# Altium PCB WireLessPhone.PcbDoc
Units mm, origin at the board's own origin, x right, y up, seen from the top; angles counter-clockwise.
Board outline 70 x 40 mm, 2 copper layers (Top Signal Layer, Bottom Signal Layer), stack 1.571 mm thick; 92 components, 56 nets, 347 pads, 0 vias.
Unrouted connection lines stored in the file: 216.
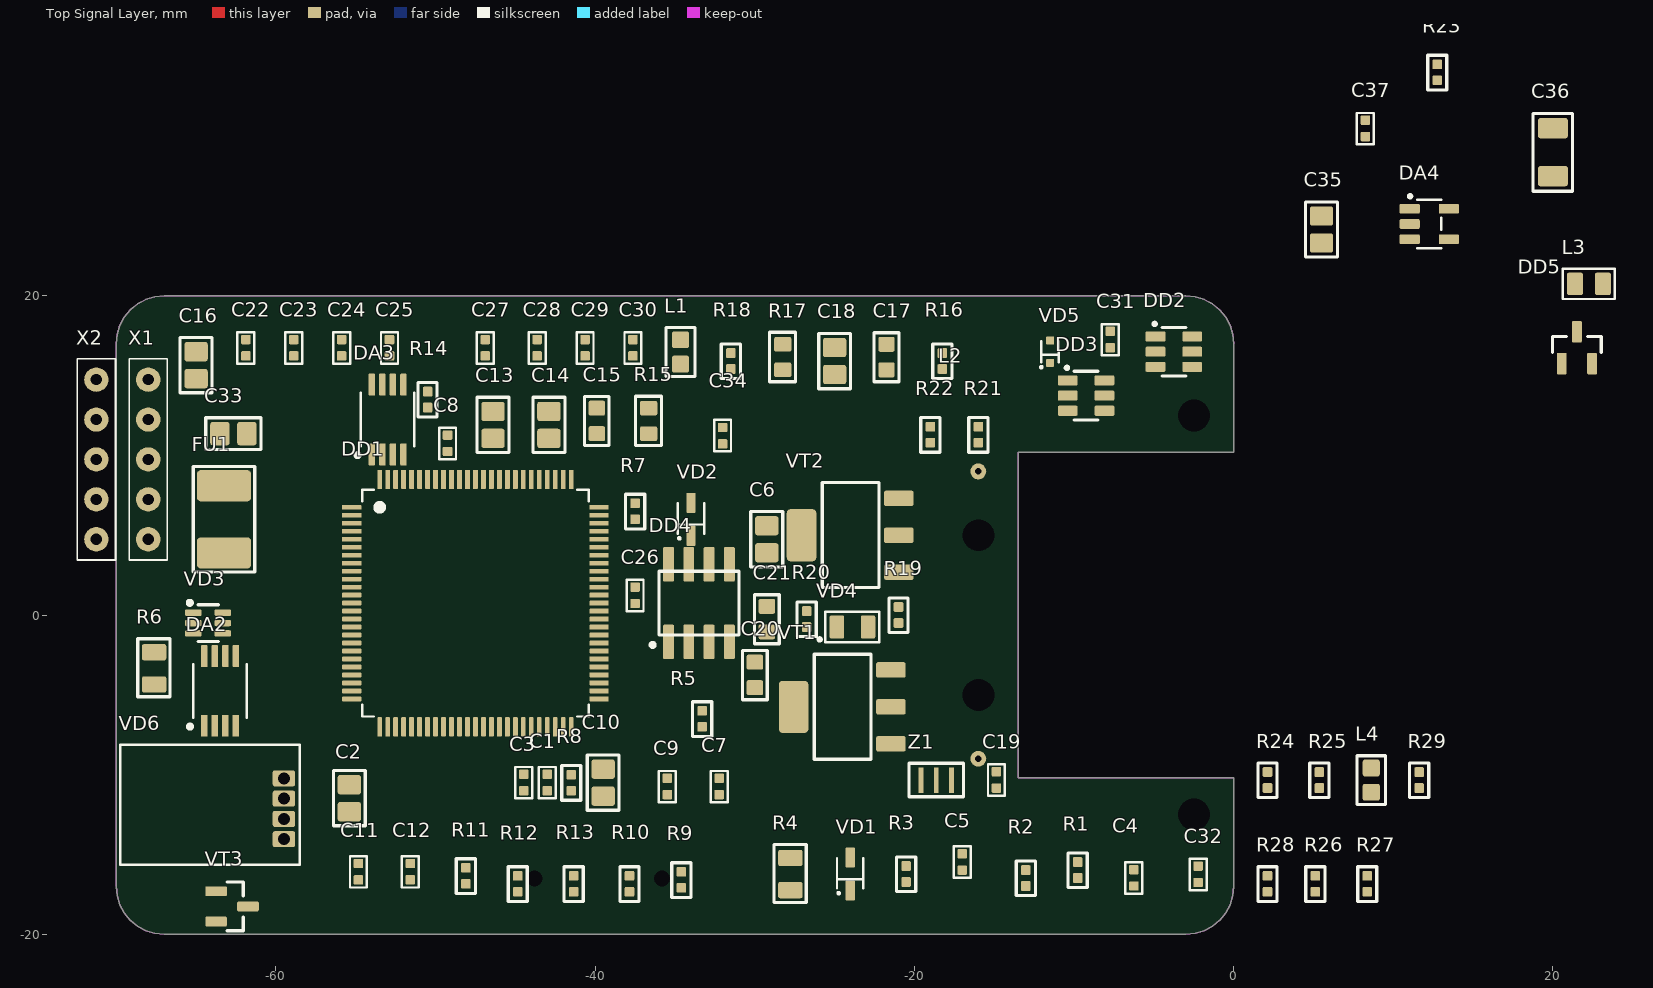
[diagram p0: Top Signal Layer view]
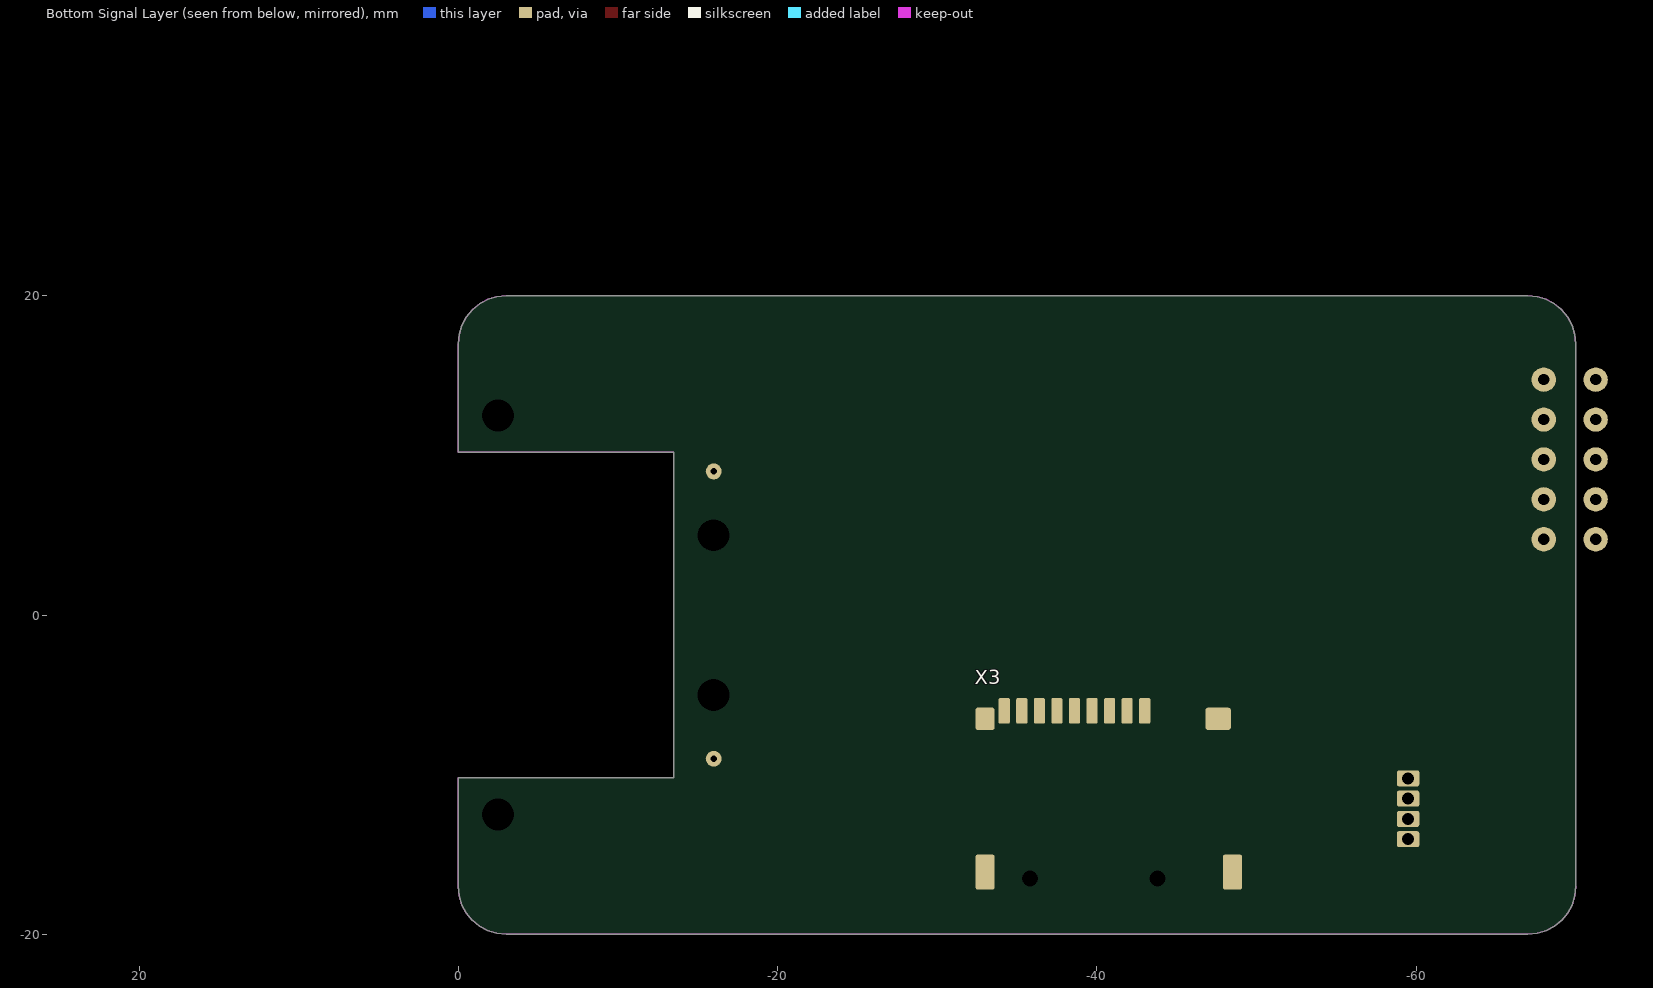
[diagram p1: Bottom Signal Layer view, seen from below]

## Layer stack, top to bottom
Top Solder: solder mask 0.0102, Solder Resist, Dk 3.5
Top Signal Layer: signal copper 0.0356
Dielectric 1: core 1.5, FR-4, Dk 4.2
Bottom Signal Layer: signal copper 0.0356
Bottom Solder: solder mask 0.0102, Solder Resist, Dk 3.5

## Board outline
0,-10.2 -13.5,-10.2 -13.5,10.2 0,10.2 0,17 -0.058,17.585 -0.228,18.148 -0.506,18.667 -0.879,19.121 -1.333,19.494 -1.852,19.772 -2.415,19.942 -3,20 -67,20 -67.585,19.942 -68.148,19.772 -68.667,19.494 -69.121,19.121 -69.494,18.667 -69.772,18.148 -69.942,17.585 -70,17 -70,-17 -69.942,-17.585 -69.772,-18.148 -69.494,-18.667 -69.121,-19.121 -68.667,-19.494 -68.148,-19.772 -67.585,-19.942 -67,-20 -3,-20 -2.415,-19.942 -1.852,-19.772 -1.333,-19.494 -0.879,-19.121 -0.506,-18.667 -0.228,-18.148 -0.058,-17.585 0,-17

## Design rules (kind name [scope] priority, off if disabled: settings)
Clearance Clearance_tracks_inner [OnLayer('Power Layer') OR OnLayer('Ground Layer')] p1: gap=0.35 ignorepadtopadclearanceinfootprint=FALSE except(0: Arc-Hole Track-Hole SMDPad-Hole THPad-Hole Via-Hole Fill-Hole Poly-Hole Region-Hole Text-Hole) // Зазоры между проводниками на внутренних слоях
Clearance Clearance_VccGnd [InNet('3,3ВD') vs InNet('DGND')] p2: gap=0.2 ignorepadtopadclearanceinfootprint=FALSE except(0: Arc-Hole Track-Hole SMDPad-Hole THPad-Hole Via-Hole Fill-Hole Poly-Hole Region-Hole Text-Hole; 0.4: THPad-Poly)
Clearance Clearance_VccGnd_1 [InNet('NetVD9_1') vs InNet('DGND')] p3: gap=0.2 ignorepadtopadclearanceinfootprint=FALSE except(0: Arc-Hole Track-Hole SMDPad-Hole THPad-Hole Via-Hole Fill-Hole Poly-Hole Region-Hole Text-Hole; 0.4: THPad-Poly)
Clearance Clearance_VccGnd_2 [InNet('NetVD2_2') vs InNet('DGND')] p4: gap=0.2 ignorepadtopadclearanceinfootprint=FALSE except(0: Arc-Hole Track-Hole SMDPad-Hole THPad-Hole Via-Hole Fill-Hole Poly-Hole Region-Hole Text-Hole; 0.4: THPad-Poly)
Clearance Clearance_VccGnd_5 [InNet('NetVD8_1') vs InNet('DGND')] p5: gap=0.2 ignorepadtopadclearanceinfootprint=FALSE except(0: Arc-Hole Track-Hole SMDPad-Hole THPad-Hole Via-Hole Fill-Hole Poly-Hole Region-Hole Text-Hole; 0.4: THPad-Poly)
Clearance Clearance_VccGnd_3 [InNet('NetVD10_1') vs InNet('DGND')] p6: gap=0.2 ignorepadtopadclearanceinfootprint=FALSE except(0: Arc-Hole Track-Hole SMDPad-Hole THPad-Hole Via-Hole Fill-Hole Poly-Hole Region-Hole Text-Hole; 0.4: THPad-Poly)
Clearance Clearance_VccGnd_4 [InNet('NetVD11_1') vs InNet('DGND')] p7: gap=0.2 ignorepadtopadclearanceinfootprint=FALSE except(0: Arc-Hole Track-Hole SMDPad-Hole THPad-Hole Via-Hole Fill-Hole Poly-Hole Region-Hole Text-Hole; 0.4: THPad-Poly)
Clearance Clearance_VccANGnd [InNet('3,3ВA') vs InNet('AGND')] p8: gap=0.2 ignorepadtopadclearanceinfootprint=FALSE except(0: Arc-Hole Track-Hole SMDPad-Hole THPad-Hole Via-Hole Fill-Hole Poly-Hole Region-Hole Text-Hole; 0.4: THPad-Poly)
Clearance [All] p9: gap=0.2 ignorepadtopadclearanceinfootprint=FALSE except(0: Arc-Hole Track-Hole SMDPad-Hole THPad-Hole Via-Hole Fill-Hole Poly-Hole Region-Hole Text-Hole)
ComponentClearance [All] p1: gap=0.001 collisioncheckmode=3 verticalgap=0 showdistances=FALSE
Height [All] p1: minheight=0 maxheight=100 prefheight=12.7
HoleSize [All] p1: absolutevalues=TRUE maxlimit=10 minlimit=0.3 maxpercent=80.000 minpercent=20.000
MinimumSolderMaskSliver [All] p1: minsoldermaskwidth=0.1
PolygonConnect PolygonConnect_MOTOR1 [InNet('NetA1_16')] p1: connectstyle=Direct reliefconductorwidth=0.254 reliefentries=4 polygonreliefangle="90 Angle" airgapwidth=0.254
PolygonConnect PolygonConnect_MOTOR2 [InNet('NetA1_17')] p2: connectstyle=Direct reliefconductorwidth=0.254 reliefentries=4 polygonreliefangle="90 Angle" airgapwidth=0.254
PolygonConnect PolygonConnect_MOTOR3 [InNet('NetA1_5')] p3: connectstyle=Direct reliefconductorwidth=0.254 reliefentries=4 polygonreliefangle="90 Angle" airgapwidth=0.254
PolygonConnect PolygonConnect_MOTOR4 [InNet('NetA1_4')] p4: connectstyle=Direct reliefconductorwidth=0.254 reliefentries=4 polygonreliefangle="90 Angle" airgapwidth=0.254
PolygonConnect PolygonConnect_SHUNT+ [InNet('8,4В')] p5: connectstyle=Direct reliefconductorwidth=0.254 reliefentries=4 polygonreliefangle="90 Angle" airgapwidth=0.254
PolygonConnect PolygonConnect_SHUNT- [InNet('NetC1_1')] p6: connectstyle=Direct reliefconductorwidth=0.254 reliefentries=4 polygonreliefangle="90 Angle" airgapwidth=0.254
PolygonConnect PolygonConnect_FUSE [InNet('NetFU1_1')] p7: connectstyle=Direct reliefconductorwidth=0.254 reliefentries=4 polygonreliefangle="90 Angle" airgapwidth=0.254
PolygonConnect PolygonConnect_SERVO [InNet('NetX3_1')] p8: connectstyle=Direct reliefconductorwidth=0.254 reliefentries=4 polygonreliefangle="90 Angle" airgapwidth=0.254
PolygonConnect PolygonConnect_Via [IsVia] p9: connectstyle=Direct reliefconductorwidth=0.254 reliefentries=4 polygonreliefangle="90 Angle" airgapwidth=0.2
PolygonConnect [All] p10: connectstyle=Relief reliefconductorwidth=0.6 reliefentries=4 polygonreliefangle="90 Angle" airgapwidth=0.2
RoutingVias [All] p1: holewidth=0.711 width=1.27 viastyle="Through Hole" minholewidth=0.711 minwidth=1.27 maxholewidth=0.711 maxwidth=1.27
ShortCircuit ShortCircuit_ANALOG [InNet('3,3В') vs InNet('3,3ВA')] p1: allowed=TRUE
ShortCircuit [All] p2: allowed=FALSE
SilkToSilkClearance [All] p1: silktosilkclearance=0
SilkToSolderMaskClearance [IsPad] p1: minsilkscreentomaskgap=0 clearancetoexposedcopper=TRUE
SolderMaskExpansion [All] p1: expansion=0.05
Width [All] p1: maxlimit=4 minlimit=0.2 preferedwidth=0.2
Width 3,3В [InNet('3,3В')] p2: maxlimit=2 minlimit=0.2 preferedwidth=1
Width 24В [InNet('24В')] p3: maxlimit=4 minlimit=0.2 preferedwidth=4
Width 5В [InNet('5В')] p4: maxlimit=3 minlimit=0.2 preferedwidth=3
23 further rules are at their usual default settings.

## Classes and differential pairs
component class WireLessPhone_PhotoHall: C29 C30 C33 C37 DD5 L4 R13 R19 R21 R22 R23 R24 R25 R29 VD6 X3
component class WireLessPhone_Microcontroller: C5 C7 C8 C12 C19 C20 C21 C22 C23 C24 C25 C26 C27 C28 C30 C31 C32 C34 DD1 DD2 DD3 DD4 L1 R12 R20 R26 R27 R28 VD4 VD5 X2 Z1
component class WireLessPhone_Power: C13 C14 C15 C16 C17 C18 C35 C36 DA3 DA4 FU1 L3 R14 R15 R16 R17 R18 VD3 X1
component class WireLessPhone_Amp: C1 C2 C3 C4 C6 C9 C10 C11 DA2 L2 R1 R2 R3 R4 R5 R6 R7 R8 R9 R10 R11 VD1 VD2 VT1 VT2 VT3 VT?

## Components (designator, comment, footprint, x,y, rotation, side; value= is the part's Value field where it differs from the comment)
C1 "Capacitor" C0402 -43.02,-11 r90 top value=10
C2 "Capacitor" C0805 -55.4,-11.472 r90 top value=10мк
C3 "Capacitor" C0402 -44.5,-11 r90 top value=?
C4 "Capacitor" C0402 -6.274,-16.972 r90 top value=0,1мк
C5 "Capacitor" C0402 -17.024,-15.972 r90 top value=0,1мк
C6 "Capacitor" C0805 -29.25,4.75 r90 top value=10мк
C7 "Capacitor" C0402 -32.25,-11.246 r90 top value=0,1мк
C8 "Capacitor" C0402 -49.27,10.25 r90 top value=0,1мк
C9 "Capacitor" C0402 -35.5,-11.246 r90 top value=0,1мк
C10 "Capacitor" C0805 -39.5,-10.5 r90 top value=10мк
C11 "Capacitor" C0402 -54.85,-16.586 r90 top value=1мк
C12 "Capacitor" C0402 -51.6,-16.586 r90 top value=0,1мк
C13 "Capacitor" C0805 -46.4,11.914 r90 top value=4,7мк
C14 "Capacitor" C0805 -42.9,11.914 r90 top value=4,7мк
C15 "Capacitor" C0603 -39.9,12.164 r90 top value=0,1мк
C16 "Capacitor" C0805 -65,15.655 r90 top value=10мк
C17 "Capacitor" C0603 -21.75,16.164 r90 top value=0,1мк
C18 "Capacitor" C0805 -25,15.914 r90 top value=10мк
C19 "Capacitor" C0402 -14.883,-10.836 r90 top value=0,1мк
C20 "Capacitor" C0603 -30,-3.75 r90 top value=2,2мк
C21 "Capacitor" C0603 -29.25,-0.25 r90 top value=2,2мк
C22 "Capacitor" C0402 -61.905,16.235 r90 top value=0,1мк
C23 "Capacitor" C0402 -58.905,16.235 r90 top value=0,1мк
C24 "Capacitor" C0402 -55.905,16.235 r90 top value=0,1мк
C25 "Capacitor" C0402 -52.905,16.235 r90 top value=0,1мк
C26 "Capacitor" C0402 -37.52,0.725 r90 top value=0,1мк
C27 "Capacitor" C0402 -46.905,16.235 r90 top value=0,1мк
C28 "Capacitor" C0402 -43.655,16.235 r90 top value=0,1мк
C29 "Capacitor" C0402 -40.655,16.235 r90 top value=0,1мк
C30 "Capacitor" C0402 -37.655,16.235 r90 top value=0,1мк
C31 "Capacitor" C0402 -7.75,16.75 r90 top value=0,1мк
C32 "Capacitor" C0402 -2.25,-16.75 r90 top value=0,1мк
C33 "Capacitor" C0805 -62.664,11.367 r180 top value=4,7мк
C34 "Capacitor" C0402 -32,11.75 r270 top value=0,1мк
C35 "Capacitor" C0805 5.5,24.155 r90 top value=4,7мк
C36 "Capacitor" C1206 19.976,29.028 r90 top value=10мк
C37 "Capacitor" C0402 8.23,29.975 r90 top value=0,1мк
DA2 "MAX4241" 8µMAX -63.5,-4.75 r90 top
DA3 "MAX4241" 8µMAX -53,12.25 r90 top
DA4 "LM3671MF-3.3/NOPB" SOT23-5 12.25,24.5 r0 top
DD1 "STM32F407VGT6" LQFP100 -47.5,0.75 r0 top
DD2 "TPD2S017" SOT23-6 -3.75,16.5 r0 top
DD3 "TPD2S017" SOT23-6 -9.25,13.75 r0 top
DD4 "MCP4921-E/P" SO8 -33.5,0.75 r90 top
DD5 "DRV5032" SOT23-3 21.5,16.75 r90 top
FU1 "Fuse" FUSE812 -63.25,6 r90 top
L1 "Inductor" L0603 -34.655,16.485 r90 top
L2 "InductorSerd" InductorPetlya 0,0 r0 top locked
L3 "Inductor" L0805 22.25,20.75 r0 top value=2,2мкГн
L4 "Inductor" L0603 8.617,-10.336 r90 top
R1 "Resistor_0,062Вт" R0402 -9.774,-15.972 r90 top value=620
R2 "Resistor_0,062Вт" R0402 -13.024,-16.472 r90 top value=4,7к
R3 "Resistor_0,062Вт" R0402 -20.524,-16.222 r90 top value=?
R4 "Resistor_0,125Вт" R0805 -27.774,-16.222 r90 top value=1
R5 "Resistor_0,062Вт" R0402 -33.3,-6.5 r90 top value=?
R6 "Resistor_0,125Вт" R0805 -67.633,-3.336 r90 top value=1
R7 "Resistor_0,062Вт" R0402 -37.5,6.5 r90 top value=3,3к
R8 "Resistor_0,062Вт" R0402 -41.5,-10.5 r90 top value=620
R9 "Resistor_0,062Вт" R0402 -34.6,-16.586 r90 top value=47
R10 "Resistor_0,062Вт" R0402 -37.85,-16.836 r90 top value=?
R11 "Resistor_0,062Вт" R0402 -48.1,-16.336 r90 top value=10к
R12 "Resistor_0,062Вт" R0402 -44.85,-16.836 r90 top value=510
R13 "Resistor_0,062Вт" R0402 -41.35,-16.836 r90 top value=100
R14 "Resistor_0,062Вт" R0402 -50.5,13.5 r90 top value=100к
R15 "Resistor_0,062Вт" R0603 -36.65,12.164 r90 top value=10к
R16 "Resistor_0,062Вт" R0402 -18.25,15.914 r90 top value=22
R17 "Resistor_0,062Вт" R0603 -28.25,16.164 r90 top value=10к
R18 "Resistor_0,062Вт" R0402 -31.5,15.914 r90 top value=22
R19 "Resistor_0,062Вт" R0402 -21,0 r90 top value=10к
R20 "Resistor_0,062Вт" R0402 -26.75,-0.25 r90 top value=10к
R21 "Resistor_0,062Вт" R0402 -16,11.3 r90 top value=10к
R22 "Resistor_0,062Вт" R0402 -19,11.3 r90 top value=10к
R23 "Resistor_0,062Вт" R0402 12.75,34 r90 top value=4,7к
R24 "Resistor_0,062Вт" R0402 2.117,-10.336 r90 top value=10к
R25 "Resistor_0,062Вт" R0402 5.367,-10.336 r90 top value=10к
R26 "Resistor_0,062Вт" R0402 5.117,-16.836 r90 top value=10к
R27 "Resistor_0,062Вт" R0402 8.367,-16.836 r90 top value=10к
R28 "Resistor_0,062Вт" R0402 2.117,-16.836 r90 top value=10к
R29 "Resistor_0,062Вт" R0402 11.617,-10.336 r90 top value=1к
VD1 "Diode" SOD-323 -24.024,-16.222 r90 top
VD2 "Diode" SOD-323 -34,6 r90 top
VD3 "USBUF" SOT323-6L -64.25,-0.5 r0 top
VD4 "LED" L_0805 -23.883,-0.75 r0 top
VD5 "DiodeSchottky" SOD-523 -11.5,16.5 r90 top
VD6 "IR_LED" TVCAST -59.5,-12.135 r90 top
VT1 "BJT NPN" SOT-223 -24.5,-5.75 r90 top
VT2 "BJT PNP" SOT-223 -24,5 r90 top
VT3 "N-MOSFET" SOT23-3 -62.75,-18.25 r0 top
X1 "Header_5_sct" 5HOLE_2.5 -68,4.75 r90 top
X2 "Header_5_sct" 5HOLE_2.5 -71.25,4.75 r90 top
X3 "MICROSD-SDIO" MICROSD -40.75,-16.5 r180 bottom
Z1 "QuartzWithCaps" CSTCE -18.633,-10.336 r0 top

## Footprints (in the part's own frame and the unit in brackets; to place one, negate y for a bottom-side part, rotate by r counter-clockwise, add the part's x,y. Pads: shape width x height; smd on the part's side, far side on the other; paste and mask are expansions set on the pad)
5HOLE_2.5 [mil]
  round 60 hole 27.56: 1(0,0) 2(98.43,0) 3(196.85,0) 4(295.28,0) 5(393.7,0)
  silkscreen extent -51,-47 445,47
8µMAX [mil]
  rrect25% 54x16 smd: 1(-86,39) 2(-86,13) 3(-86,-13) 4(-86,-39) 5(86,-39) 6(86,-13) 7(86,13) 8(86,39)
  silkscreen extent -93,-66 66,79, body extent -99,-58 97,60, height 37
C0402 [mm]
  rrect25% 0.59x0.6 smd: 1(0,-0.02) 2(1.025,-0.02)
  silkscreen extent -0.48,-0.55 1.48,0.51, body extent 0.01,-0.25 1.01,0.25, height 0.48
C0603 [mm]
  rrect25% 0.94x1.03 smd: 1(-0.8,0) 2(0.8,0)
  silkscreen extent -1.55,-0.77 1.53,0.77, body extent -0.8,-0.4 0.8,0.4, height 0.9
C0805 [mm]
  rrect25% 1.21x1.46 smd paste-5: 1(-0.845,0) 2(0.845,0)
  silkscreen extent -1.73,-1 1.73,1, body extent -1,-0.62 1,0.63, height 0.78
C1206 [mm]
  rrect25% 1.28x1.87 smd: 1(-1.528,-0.024) 2(1.472,-0.024)
  silkscreen extent -2.47,-1.25 2.4,1.22, body extent -1.6,-0.85 1.6,0.85, height 1.75
CSTCE [mm]
  rect 0.3x1.6 smd: 1(-0.95,0) 2(0,0) 3(0.95,0)
  silkscreen extent -1.7,-1.05 1.7,1.05, body extent -1.6,-0.65 1.6,0.65, height 1.02
FUSE812 [mm] "Самовосстанавливающийся предохранитель"
  rrect25% 1.95x3.4 smd: 1(-2.1,0) 2(2.1,0)
  silkscreen extent -3.3,-1.92 3.3,1.92, body extent -2.41,-1.61 2.41,1.61, height 1.32
InductorPetlya [mm]
  round 1 hole 0.4 unplated: 1(-16,9) 2(-16,-9)
  round 0 hole 2 unplated: ""(-16,-5) ""(-16,5) ""(-2.5,-12.5) ""(-2.5,12.5)
  body extent -18.5,-15 0,15, height 1.7
L0603 [mm]
  rrect25% 1.05x1.07 smd paste-5: 1(-0.76,0) 2(0.76,0)
  silkscreen extent -1.53,-0.9 1.53,0.9, body extent -0.8,-0.4 0.8,0.4, height 0.8
L0805 [mm]
  rrect25% 1x1.4 smd: 1(-0.875,0) 2(0.875,0)
  silkscreen extent -1.63,-0.95 1.63,0.95, body extent -1,-0.6 1,0.6, height 0.95
L_0805 [mm] "SMD LED LAMP"
  rrect25% 0.91x1.46 smd: 1(-0.975,0) 2(0.975,0)
  silkscreen extent -2.15,-0.95 1.68,0.95, body extent -1.01,-0.62 1.01,0.63, height 1.1
LQFP100 [mm]
  rrect25% 1.2x0.3 smd: 1(-7.75,6) 2(-7.75,5.5) 3(-7.75,5) 4(-7.75,4.5) 5(-7.75,4) 6(-7.75,3.5) 7(-7.75,3) 8(-7.75,2.5) 9(-7.75,2) 10(-7.75,1.5) 11(-7.75,1) 12(-7.75,0.5) 13(-7.75,0) 14(-7.75,-0.5) 15(-7.75,-1) 16(-7.75,-1.5) 17(-7.75,-2) 18(-7.75,-2.5) 19(-7.75,-3) 20(-7.75,-3.5) 21(-7.75,-4) 22(-7.75,-4.5) 23(-7.75,-5) 24(-7.75,-5.5) 25(-7.75,-6) 51(7.75,-6) 52(7.75,-5.5) 53(7.75,-5) 54(7.75,-4.5) 55(7.75,-4) 56(7.75,-3.5) 57(7.75,-3) 58(7.75,-2.5) 59(7.75,-2) 60(7.75,-1.5) 61(7.75,-1) 62(7.75,-0.5) 63(7.75,0) 64(7.75,0.5) 65(7.75,1) 66(7.75,1.5) 67(7.75,2) 68(7.75,2.5) 69(7.75,3) 70(7.75,3.5) 71(7.75,4) 72(7.75,4.5) 73(7.75,5) 74(7.75,5.5) 75(7.75,6)
  rrect25% 0.3x1.2 smd: 26(-6,-7.75) 27(-5.5,-7.75) 28(-5,-7.75) 29(-4.5,-7.75) 30(-4,-7.75) 31(-3.5,-7.75) 32(-3,-7.75) 33(-2.5,-7.75) 34(-2,-7.75) 35(-1.5,-7.75) 36(-1,-7.75) 37(-0.5,-7.75) 38(0,-7.75) 39(0.5,-7.75) 40(1,-7.75) 41(1.5,-7.75) 42(2,-7.75) 43(2.5,-7.75) 44(3,-7.75) 45(3.5,-7.75) 46(4,-7.75) 47(4.5,-7.75) 48(5,-7.75) 49(5.5,-7.75) 50(6,-7.75) 76(6,7.75) 77(5.5,7.75) 78(5,7.75) 79(4.5,7.75) 80(4,7.75) 81(3.5,7.75) 82(3,7.75) 83(2.5,7.75) 84(2,7.75) 85(1.5,7.75) 86(1,7.75) 87(0.5,7.75) 88(0,7.75) 89(-0.5,7.75) 90(-1,7.75) 91(-1.5,7.75) 92(-2,7.75) 93(-2.5,7.75) 94(-3,7.75) 95(-3.5,7.75) 96(-4,7.75) 97(-4.5,7.75) 98(-5,7.75) 99(-5.5,7.75) 100(-6,7.75)
  silkscreen extent -7.1,-7.1 7.1,7.1, body extent -8.07,-8.07 8.07,8.07, height 1.62
MICROSD [mm]
  rrect25% 0.7x1.6 smd: 1(2.25,10.5) 2(1.15,10.5) 3(0.05,10.5) 4(-1.05,10.5) 5(-2.15,10.5) 6(-3.25,10.5) 7(-4.35,10.5) 8(-5.45,10.5) 9(-6.55,10.5)
  rrect25% 1.2x2.2 smd: 6(-7.75,0.4) 6(7.75,0.4)
  rrect25% 1.2x1.4 smd: 6(-7.75,10)
  rrect25% 1.6x1.4 smd: 6(6.85,10)
  round 0 hole 1 unplated: ""(-4.93,0) ""(3.05,0)
  body extent -8,-4.02 8,11.22, height 1.91
R0402 [mm]
  rrect25% 0.61x0.6 smd: 1(-0.5,0) 2(0.5,0)
  silkscreen extent -1.1,-0.6 1.07,0.6, body extent -0.55,-0.25 0.45,0.25, height 0.35
R0603 [mm]
  rrect25% 0.92x1.08 smd: 1(-0.8,0) 2(0.8,0)
  silkscreen extent -1.55,-0.8 1.55,0.82, body extent -0.8,-0.4 0.8,0.4, height 0.5
R0805 [mm] "Chip Resistor, 2-Leads, Body 2,10x1,30mm, IPC Medium Density"
  rrect25% 1.02x1.53 smd paste-5: 1(-1.008,0) 2(1.008,0)
  silkscreen extent -1.78,-1 1.85,1.02, body extent -1.1,-0.7 1.1,0.7, height 0.55
SO8 [mm]
  rrect25% 2.17x0.68 smd: 1(-2.43,1.905) 2(-2.43,0.635) 3(-2.43,-0.635) 4(-2.43,-1.905) 5(2.43,-1.905) 6(2.43,-0.635) 7(2.43,0.635) 8(2.43,1.905)
  silkscreen extent -2.74,-2.5 2,3.02, body extent -3,-2.54 3,2.54, height 1.7
SOD-323 [mm]
  rrect25% 1.26x0.58 smd: 1(-1.03,0) 2(1.03,0)
  silkscreen extent -1.26,-0.82 1,0.82, body extent -1.3,-0.67 1.3,0.68, height 1.1
SOD-523 [mm]
  rrect25% 0.5x0.5 smd: 1(-0.7,0) 2(0.7,0)
  silkscreen extent -1.04,-0.55 0.65,0.62, body extent -0.8,-0.4 0.8,0.4, height 0.7
SOT23-3 [mm]
  rrect25% 1.35x0.61 smd: 1(-1,0.95) 2(-1,-0.95) 3(1,0)
  silkscreen extent -0.3,-1.52 0.7,1.52, body extent -1.15,-1.5 1.15,1.5, height 1.1
SOT23-5 [mm]
  rrect25% 1.26x0.61 smd: 1(-1.225,0.95) 2(-1.225,0) 3(-1.225,-0.95) 4(1.225,-0.95) 5(1.225,0.95)
  silkscreen extent -1.3,-1.52 0.75,1.84, body extent -1.6,-1.56 1.6,1.55, height 1.45
SOT23-6 [mm]
  rrect25% 1.24x0.63 smd: 1(-1.15,0.95) 2(-1.15,0) 3(-1.15,-0.95) 4(1.15,-0.95) 5(1.15,0) 6(1.15,0.95)
  silkscreen extent -1.3,-1.52 0.75,1.84, body extent -1.2,-1.4 1.22,1.4, height 1.09
SOT323-6L [mm]
  rrect50% 1.05x0.4 smd: 1(-0.925,0.65) 2(-0.925,0) 3(-0.925,-0.65) 4(0.925,-0.65) 5(0.925,0) 6(0.925,0.65)
  silkscreen extent -1.27,-1.15 0.64,1.39, body extent -1.05,-1 1.05,1, height 0.93
SOT-223 [mm]
  rrect25% 0.97x1.85 smd: 1(-2.311,-3.024) 2(0,-3.024) 3(2.311,-3.024)
  rrect25% 3.27x1.85 smd: 2(0,3.074)
  silkscreen extent -3.28,-1.78 3.3,1.78, body extent -3.25,-3.54 3.25,3.54, height 1.65
TVCAST [mm]
  rrect25% 1x1.4 hole 0.75: 1(-1.905,0) 1(1.905,0) 2(-0.635,0) 3(0.635,0)
  silkscreen extent -3.5,-1 4,10.25, body extent -3.15,-0.38 3.65,9.95, height 2.65

## Part data
C1 C3: library part cap5, "Конденсатор", Manufacture=Murata, Part Name=Ceramic, Part Number=GRM1535C1H100J, Voltage=50B, id=cap5, TKE=NP0
C2 C6 C10 C16 C18: library part cap201, "Конденсатор", Manufacture=Murata, Part Name=Ceramic, Part Number=GRM21BR71A106KE51L, Voltage=10В, id=cap201, TKE=X7R
C4 C5 C7 C8 C9 C12 C19 C22 C23 C24 C25 C26 C27 C28 C29 C30 C31 C32 C34 C37: library part cap52, "Конденсатор", Manufacture=Murata, Part Name=Ceramic, Part Number=GRM155F51E104Z**, Voltage=25B, id=cap52, TKE=Y5V
C11: library part cap55, "Конденсатор", Manufacture=Murata, Part Name=Ceramic, Part Number=GRM155R61A105K, Voltage=10B, id=cap55, TKE=Y5V
C13 C14 C33 C35: library part cap154, "Конденсатор", Manufacture=Murata, Part Name=Ceramic, Part Number=GRM21BR61E475KA12L, Voltage=25B, id=cap154, TKE=X5R
C15 C17: library part cap131, "Конденсатор", Manufacture=Murata, Part Name=Ceramic, Part Number=GRM188R71H104K, Voltage=50B, id=cap131, TKE=X7R
C20 C21: library part cap135, "Конденсатор", Manufacture=Murata, Part Name=Ceramic, Part Number=GRM188R71A225KE15D, Voltage=50B, id=cap135, TKE=X7R
C36: library part cap191, "Конденсатор", Manufacture=Murata, Part Name=Ceramic, Part Number=GRM31CR71C106K*, Voltage=16В, id=cap191, TKE=X7R
DA2 DA3: library part amp9, "МИКРОМОЩНЫЙ Single/Dual/Quad, +1.8V/10µA, SOT23,  Beyond-the-Rails Op Amps", Input Bias Current=(+-)2,3nA, Manufacture="Maxim Integrated", Offset voltage=(+-)0,2mB, Part Name="Micropower / Operational Amplifiers", Part Number=MAX4241EUA, Supply Current max=10uA, Supply Voltage="1,8V–5,5V or (+-)0,9В-(+-)2,75B", Bandwidth=90kHz, Channels=1, CMRR=90dB, id=amp9, PSRR=85dB, Rail-to-rail=yes
DA4: library part pwr2, "Step-Down DC-DC Converter", Current=0,6A, Input Voltage="2,7 - 5,5B", Manufacturer="Texas Instruments", Output Voltage=3,3B, Part Name="600-mA Step-Down DC-DC Converter", id=pwr2, Part Number=LM3671MF-3.3/NOPB, Type=Impulse
DD1: library part microcont6, "Микроконтроллер STM32F407VGT6", Frequency=168MHz, Part Name=Microcontroller, Power Supply=1.8-3.6V, ADC=16x12b/2x12b, Flash=1Mb, id=microcont6, Interface="can, eth, i2c, irda, lin, spi, uart, usbotg", Part Number=STM32F407VGT6, Pin in=82
DD2 DD3: library part diode20, "EMI Filter", Capacitance=1pF, Manufacture="Texas Instruments", Max Reverse Voltage=12B, Part Name="ESD Suppressors", Part Number=TPD2S017DBVR, id=diode20, Number of Channels=2
DD4: library part interf10, "12-Bit DAC with SPI™ Interface", Manufacture=Microchip, Part Name="DAC - SPI Rail-to-Rail", Power Supply=2.7-5.5V, id=interf10, Number of Channel=2, Part Number=MCP4921-E/P, Resolution=12bit, Type Supply="Single Polar", Vref output=yes
DD5: library part DRV5032FA, "Датчик Холла с рекордно низким потреблением", Manufacture="Texas Instruments", Part Name="Hall sensor", Power Supply=1,65B...5,5B, id=hall1, MAGNETIC RESPONSE=Omnipolar, Magnetic threshold=4,8mT, OUTPUT TYPE=Push-pull, Part Number=DRV5032FA, SAMPLING RATE="20 Hz"
FU1: library part fuse0, "Предохранитель", Manufacture=Bourns, Part Name="Resettable Fuses", Part Number=MF-MSMF075, Resistance=0,45Ohms, id=fuse0, I hold=0,75A, I max=100A, I trip=1,5A, V max=13,2B
L1 L4: library part ind0, "EMI Suppression Filter", Part Name="EMI Suppression Filters", Part Number=BLM18PG181SN1D, Rated Current=1,5A, Resistance=0,09Ohm, id=ind0
L2: library part ind67, "EMI Suppression Filter", Part Name="My own inductor for petlya", id=ind67
L3: library part ind4, "EMI Suppression Filter", Manufacture=Mouser, Part Number=MLF2012A2R2KT000, Rated Current=0,05A, Resistance=500mOhm, id=ind4, Part Name=Inductor
R1 R8: library part res261, "Резистор", Manufacture=Yageo, Part Name=Resistor, Part Number=RC0402FR-07620RL, Power=0,062Вт, Accuracy=1%, id=res261
R2 R23: library part res282, "Резистор", Manufacture=Yageo, Part Name=Resistor, Part Number=RC0402FR-074K7, Power=0,062Вт, Accuracy=1%, id=res282
R3 R5 R7 R10: library part res278, "Резистор", Manufacture=Yageo, Part Name=Resistor, Part Number=RC0402FR-072K3, Power=0,062Вт, Accuracy=1%, id=res278
R4 R6: library part res1, "Резистор", Manufacture=Yageo, Part Name=Resistor, Part Number=RC0805FR-071RL, Power=0,125Вт, Accuracy=1%, id=res1
R9: library part res234, "Резистор", Manufacture=Yageo, Part Name=Resistor, Part Number=RC0402FR-0747RL, Power=0,062Вт, Accuracy=1%, id=res234
R11 R19 R20 R21 R22 R24 R25 R26 R27 R28: library part res290, "Резистор", Manufacture=Yageo, Part Name=Resistor, Part Number=RC0402FR-0710KL, Power=0,062Вт, Accuracy=1%, id=res290
R12: library part res259, "Резистор", Manufacture=Yageo, Part Name=Resistor, Part Number=RC0402FR-07510RL, Power=0,062Вт, Accuracy=1%, id=res259
R13: library part res242, "Резистор", Manufacture=Yageo, Part Name=Resistor, Part Number=RC0402FR-07100RL, Power=0,062Вт, Accuracy=1%, id=res242
R14: library part res314, "Резистор", Manufacture=Yageo, Part Name=Resistor, Part Number=RC0402FR-07100KL, Power=0,062Вт, Accuracy=1%, id=res314
R15 R17: library part res483, "Резистор", Manufacture=Yageo, Part Name=Resistor, Part Number=RC0603FR-0710KL, Power=0,062Вт, Accuracy=1%, id=res483
R16 R18: library part res226, "Резистор", Manufacture=Yageo, Part Name=Resistor, Part Number=RC0402FR-0722RL, Power=0,062Вт, Accuracy=1%, id=res226
R29: library part res266, "Резистор", Manufacture=Yageo, Part Name=Resistor, Part Number=RC0402FR-071KL, Power=0,062Вт, Accuracy=1%, id=res266
VD1 VD2: library part diode18, "Диод", Breakdown Current=100nA, Capacitance=2pF, Forward Current=0,25А, Forward Voltage=1,25В, Manufacture="NXP Semiconductor", Max Reverse Voltage=250В, Part Number=BAS321.115, id=diode18, Number of Channels=1, Part Name=Diode, Reverse Recovery time=50ns
VD3: library part diode23, "EMEMI filter and line termination for USB upstream ports", Capacitance=47pF, Manufacture="ST Microelectronics", Part Name="EMI filter for USB upstream ports", Part Number=USBUF02W6, id=diode23, Number of Channels=2
VD4: library part diode8, "Светодиод", Part Number=KP-2012EC, id=diode8, Part Name=LED
VD5: library part diode21, "Диод Шоттки", Breakdown Current=600uA, Capacitance=25pF, Forward Current=1А, Forward Voltage=0,62B, Manufacture="NXP Semiconductor", Max Reverse Voltage=20B, Part Name="Diode Schottky", Part Number=PMEG2010AEB.115, id=diode21, Number of Channels=1
VD6: library part diode26, "Светодиод", Carrier Frequency=38kHz, Manufacture=Vishay, Part Name="IR Receiver Modules", Part Number=TSOP39238, Supply Voltage=2,5-5,5B, Detection Treshold=0.08, id=diode26, Transmission Distance=30m, Viewing Angle=(+-)45
VT1: library part bjt3, Frequency=130МГц, Part Name=Transistor, Part Number=PBSS4540Z.115, Power=2Вт, hfe=300, Ic max=5А, id=bjt3, Structure=npn, Vceo max=40В
VT2: library part bjt4, Frequency=130МГц, Part Name=Transistor, Part Number=PBSS5540Z.115, Power=2Вт, hfe=300, Ic max=5А, id=bjt4, Structure=pnp, Vceo max=40В
VT3: library part trans2, Continuous drain current=1,2A, Gate-to-source voltage=(+-)12B, Manufacturer="International Rectifier", Part Name=Transistor, Part Number=IRLML2402TRPBF, Power dissipation=0,54W, Pulsed drain current=7,4A, id=trans2, Rds=0,25Ohm, Structure=n-channel, V drain-source max=20B
X1 X2: library part connect41, "Разъем - 5 конт. розетка", Part Name="Hole for connector", Etch=2,5mm, id=connect41
  X1: Contact_1=VBUS, Contact_2=D-, Contact_3=D+, Contact_4=ID, Contact_5=GND
  X2: Contact_1=+3,3B, Contact_2=SWCLK, Contact_3=GND, Contact_4=SWDIO, Contact_5=RESET
X3: library part connect43, Part Name="MICRO SD-SDIO", Contact_1=DAT2, Contact_2=CD/DAT3, Contact_3=CMD, Contact_4=VDD, Contact_5=CLK, Contact_6=VSS, Contact_7=DAT0, Contact_8=DAT1, id=connect43
Z1: library part crystal5, "Кварцевый резорнатор со встроенными нагрузочными конденсаторами", Frequence=12MHz, Manufacture=Murata, Part Number=CSTCE12M0G52-R0, id=crystal5

## Nets (pads, with @x,y where several pads share a name; then routed paths per layer and width w, separated by ;. In a path a pad name is that pad's centre, name@x,y a point inside that pad or via, vN(x,y) a via of type N, cw(c..) or ccw(c..) an arc to the next point about the centre after c; other vN are vias at no path point)
1,9В: C2.2 C4.2 C13.2 C14.2 C15.2 C16.2 C35.2 DA2.7 DA3.7 DA3.8 DA4.1 DA4.3 DD1.68 FU1.2 R1.2 R2.2 R15.2 VD3.2 VT1.3
3,3B: C12.1 C19.1 C22.1 C23.1 C24.1 C25.1 C26.1 C27.1 C28.1 C29.1 C31.1 C32.1 C36.2 DA4.4 DD1.6 DD1.11 DD1.19 DD1.28 DD1.50 DD1.75 DD1.100 DD2.5 DD3.5 DD4.1 DD5.1 L1.2 L3.2 L4.2 R13.2 R20.2 R21.2 R22.2 R23.2 R24.2 R25.2 R26.2 R27.2 VD5.2
-1,9В: C2.1 C3.1 C4.1 C5.2 C7.2 C8.2 C9.1 C9.2 C10.1 C10.2 C11.1 C12.2 C13.1 C14.1 C15.1 C16.1 C17.1 C18.1 C18.2 C19.2 C20.1 C21.1 C22.2 C23.2 C24.2 C25.2 C26.2 C27.2 C28.2 C29.2 C30.2 C31.2 C33.1 C34.2 C35.1 C36.1 C37.2 DA2.4 DA3.2 DA3.4 DA3.6 DA4.2 DD1.10 DD1.20 DD1.27 DD1.74 DD1.94 DD1.99 DD2.2 DD3.2 DD4.5 DD4.7 DD5.3 L2.2 R7.1 R8.1 R11.1 R12.1 R14.2 R17.1 R28.1 VD6.1 VT2.2 VT3.2 X1.5 X2.3 X3.6 X3.9 Z1.2
MCU_RESET: C5.1 DD1.14 DD3.1 R26.1
MCU_SPI_CLK: DD1.52 DD4.3
MCU_SPI_CS: DD1.51 DD4.2 R20.1
MCU_SPI_MOSI: DD1.54 DD4.4
MCU_SWCLK: DD1.76 DD2.6
MCU_SWDIO: DD1.72 DD2.1
NetC1_1: C1.1 DA2.2 R3.2 R5.2
NetC1_2: C1.2 DA2.6 L2.1 R3.1 R4.1 R6.2 R10.1 VD1.1 VD2.2
NetC3_2: C3.2 R10.2
NetC6_1: C6.1
NetC6_2: C6.2 DA2.3 R7.2
NetC7_1: C7.1 C8.1 DD1.21 DD1.22 L1.1
NetC11_2: C11.2 R5.1
NetC17_2: C17.2 DA3.3 R15.1 R17.2
NetC20_2: C20.2 DD1.49
NetC21_2: C21.2 DD1.73
NetC30_1: C30.1 L4.1 X3.4
NetC32_2: C32.2 C34.1 DD4.6 R27.1 R28.2
NetC33_2: C33.2 R13.1 R19.2 VD6.2
NetC37_1: C37.1 DD1.56 R29.2
NetDA2_8: DA2.8 R2.1
NetDA4_5: DA4.5 L3.1
NetDD1_3: DD1.3 R9.1
NetDD1_12: DD1.12 Z1.3
NetDD1_13: DD1.13 Z1.1
NetDD1_26: DD1.26 R19.1 VD6.3
NetDD1_65: DD1.65 R24.1 X3.7
NetDD1_66: DD1.66 R25.1 X3.8
NetDD1_69: DD1.69 R14.1 X1.4
NetDD1_70: DD1.70 VD3.4
NetDD1_71: DD1.71 VD3.6
NetDD1_78: DD1.78 R21.1 X3.1
NetDD1_79: DD1.79 R22.1 X3.2
NetDD1_80: DD1.80 X3.5
NetDD1_83: DD1.83 R23.1 X3.3
NetDD1_93: DD1.93 VD4.2
NetDD2_3: DD2.3 X2.4
NetDD2_4: DD2.4 X2.2
NetDD3_3: DD3.3 X2.5
NetDD4_8: DD4.8
NetDD5_2: DD5.2 R29.1
NetFU1_1: FU1.1 X1.1
NetR1_1: R1.1 VD1.2 VT1.1
NetR4_2: R4.2 VT1.2
NetR6_1: R6.1 VT2.3
NetR8_2: R8.2 VD2.1 VT2.1
NetR9_2: R9.2 R11.2 VT3.1
NetR12_2: R12.2 VD4.1
NetR16_1: R16.1 X1.3
NetR16_2: R16.2 VD3.1
NetR18_1: R18.1 X1.2
NetR18_2: R18.2 VD3.3
NetVD5_1: VD5.1 X2.1
pads on no net: DA2.1 DA2.5 DA3.1 DA3.5 DD1.1 DD1.2 DD1.4 DD1.5 DD1.7 DD1.8 DD1.9 DD1.15 DD1.16 DD1.17 DD1.18 DD1.23 DD1.24 DD1.25 DD1.29 DD1.30 DD1.31 DD1.32 DD1.33 DD1.34 DD1.35 DD1.36 DD1.37 DD1.38 DD1.39 DD1.40 DD1.41 DD1.42 DD1.43 DD1.44 DD1.45 DD1.46 DD1.47 DD1.48 DD1.53 DD1.55 DD1.57 DD1.58 DD1.59 DD1.60 DD1.61 DD1.62 DD1.63 DD1.64 DD1.67 DD1.77 DD1.81 DD1.82 DD1.84 DD1.85 DD1.86 DD1.87 DD1.88 DD1.89 DD1.90 DD1.91 DD1.92 DD1.95 DD1.96 DD1.97 DD1.98 DD3.4 DD3.6 L2. VD3.5 VT3.3 X3.

## Keep-outs
Keep-Out Layer:
  the board outline again, w0.01